# Altium PCB soic-8-breakout-board.PcbDoc
Units mm, origin at the board's own origin, x right, y up, seen from the top; angles counter-clockwise.
Board outline 20.28 x 15.27 mm, 2 copper layers (F.Cu, B.Cu); 3 components, 9 nets, 18 pads, 0 vias.
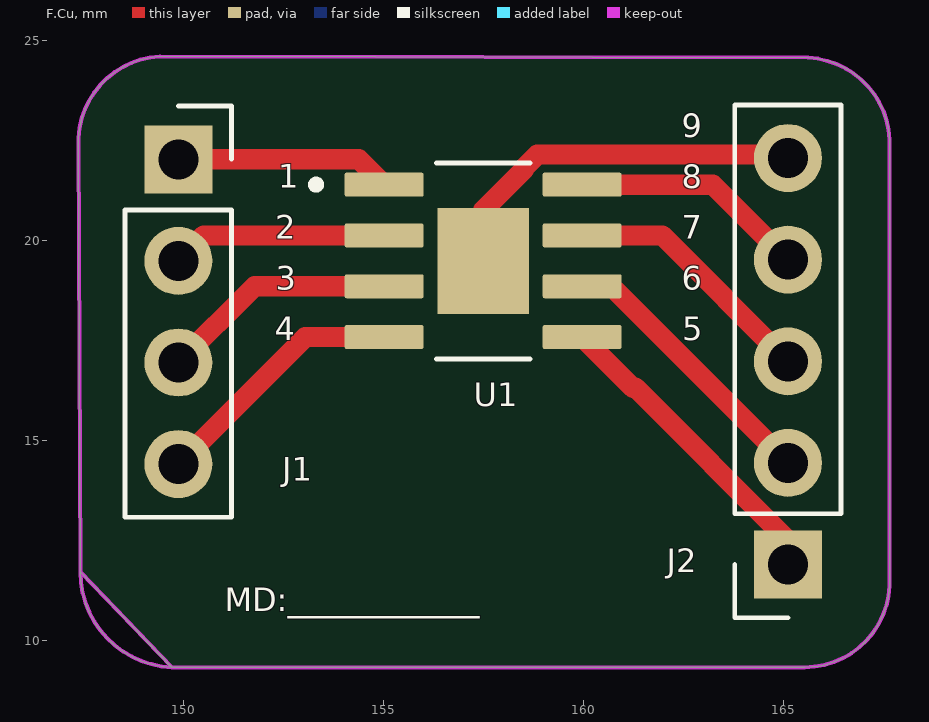
[diagram p0: F.Cu view]
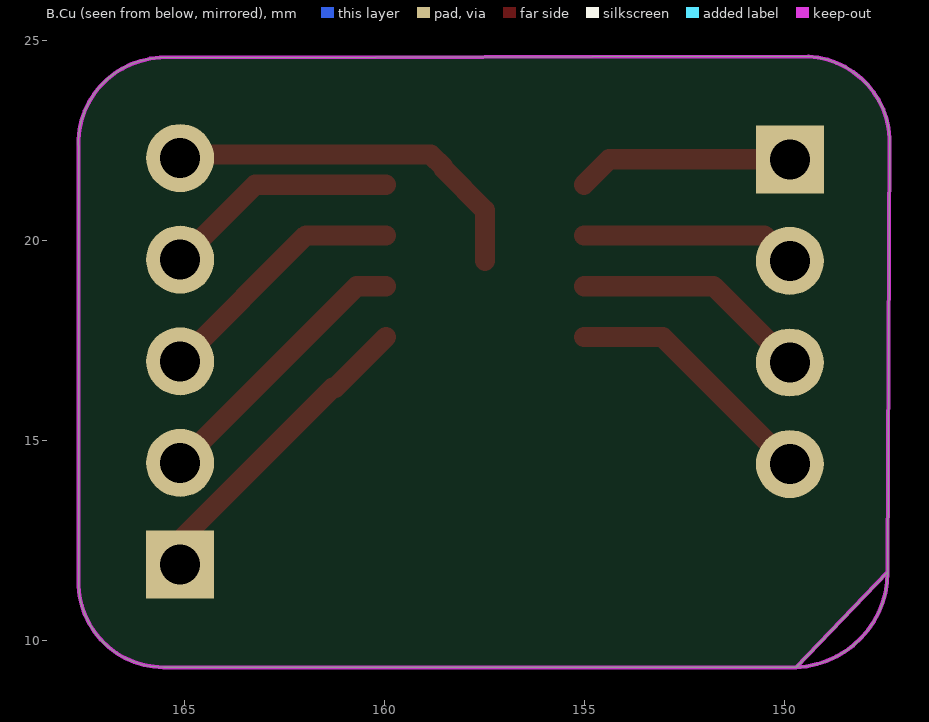
[diagram p1: B.Cu view, seen from below]

## Layer stack, top to bottom
F.Mask: solder mask 0.0102, Solder Resist, Dk 3.5
F.Cu: signal copper 0.0356
Dielectric 1: dielectric 0.32, FR-4, Dk 4.8
B.Cu: signal copper 0.0356
B.Mask: solder mask 0.0102, Solder Resist, Dk 3.5

## Board outline
147.412,11.708 ccw(c149.793,11.708) 149.698,9.33 165.516,9.33 ccw(c165.516,11.457) 167.64,11.362 167.64,22.284 ccw(c165.497,22.426) 149.396,24.6 ccw(c149.507,22.457) 147.364,22.568 147.412,11.708 ccw(c149.793,11.708) 147.412,11.708

## Design rules (kind name [scope] priority, off if disabled: settings)
Clearance [All] p1: gap=0.254 ignorepadtopadclearanceinfootprint=FALSE except(0: Arc-Hole Track-Hole SMDPad-Hole THPad-Hole Via-Hole Fill-Hole Poly-Hole Region-Hole Text-Hole)
MinimumSolderMaskSliver [All] p1: minsoldermaskwidth=0
PolygonConnect [All] p1: connectstyle=Direct reliefconductorwidth=0.254 reliefentries=4 polygonreliefangle="90 Angle" airgapwidth=0.254
RoutingVias [All] p1: holewidth=0.711 width=1.27 viastyle="Through Hole" minholewidth=0.711 minwidth=1.27 maxholewidth=0.711 maxwidth=1.27
SilkToSilkClearance [All] p1: silktosilkclearance=0
SilkToSolderMaskClearance [IsPad] p1: minsilkscreentomaskgap=0 clearancetoexposedcopper=TRUE
SolderMaskExpansion [All] p1: expansion=0.102 istentingtop=FALSE
Width [All] p1: maxlimit=10 minlimit=0.254 preferedwidth=0.254 bottomlayer_maxwidth=0.254 minimp=50.000000 maximp=50.000000 favimp=50.000000
27 further rules are at their usual default settings.

## Components (designator, comment, footprint, x,y, rotation, side; value= is the part's Value field where it differs from the comment)
J1 "Conn_01x04_Female" PinSocket_1x04_P2.54mm_Vertical 149.86,22.03 r0 top
J2 "Conn_01x05_Female" PinSocket_1x05_P2.54mm_Vertical 165.1,11.9 r180 top
U1 "ADP7158ARDZ-3.3-R7" SOIC127P600X175-9N 157.48,19.49 r0 top

## Footprints (in the part's own frame and the unit in brackets; to place one, negate y for a bottom-side part, rotate by r counter-clockwise, add the part's x,y. Pads: shape width x height; smd on the part's side, far side on the other; paste and mask are expansions set on the pad)
PinSocket_1x04_P2.54mm_Vertical [mm]
  rect 1.7x1.7 hole 1 paste-2539.97 mask+0: 1(0,0)
  rrect100% 1.7x1.7 hole 1 paste-2539.97 mask+0: 2(0,-2.54) 3(0,-5.08) 4(0,-7.62)
  silkscreen extent -1.33,-8.95 1.33,1.33
PinSocket_1x05_P2.54mm_Vertical [mm]
  rect 1.7x1.7 hole 1 paste-2539.97 mask+0: 1(0,0)
  rrect100% 1.7x1.7 hole 1 paste-2539.97 mask+0: 2(0,-2.54) 3(0,-5.08) 4(0,-7.62) 5(0,-10.16)
  silkscreen extent -1.33,-11.49 1.33,1.33
SOIC127P600X175-9N [mm]
  rrect15% 1.97x0.6 smd mask+0: 1(-2.475,1.905) 2(-2.475,0.635) 3(-2.475,-0.635) 4(-2.475,-1.905) 5(2.475,-1.905) 6(2.475,-0.635) 7(2.475,0.635) 8(2.475,1.905)
  rect 2.29x2.646 smd mask+0: 9(0,0)
  silkscreen extent -4.27,-2.45 1.17,2.45

## Part data
J1: library part PinSocket_1x04_P2.54mm_Vertical, "Through hole straight socket strip, 1x04, 2.54mm pitch, single row (from Kicad 4.0.7), script generated", Sheetfile=soic-8-breakout-board.kicad_sch
J2: library part PinSocket_1x05_P2.54mm_Vertical, "Through hole straight socket strip, 1x05, 2.54mm pitch, single row (from Kicad 4.0.7), script generated", Sheetfile=soic-8-breakout-board.kicad_sch
U1: library part SOIC127P600X175-9N, MANUFACTURER="ANALOG DEVICES", MAXIMUM_PACKAGE_HEIGHT="1.75 mm", PARTREV=C, SNAPEDA_PN=ADP7158ARDZ-3.3-R7, STANDARD="IPC 7351B", Sheetfile=soic-8-breakout-board.kicad_sch

## Nets (pads, with @x,y where several pads share a name; then routed paths per layer and width w, separated by ;. In a path a pad name is that pad's centre, name@x,y a point inside that pad or via, vN(x,y) a via of type N, cw(c..) or ccw(c..) an arc to the next point about the centre after c; other vN are vias at no path point)
Net-(J1-Pad1): J1.1 U1.1 | length 5.4
  F.Cu w0.508: J1.1 154.37,22.03 U1.1
Net-(J1-Pad2): J1.2 U1.2 | length 5.4
  F.Cu w0.508: J1.2 150.495,20.125 U1.2
Net-(J1-Pad3): J1.3 U1.3 | length 5.9
  F.Cu w0.508: J1.3 151.765,18.855 U1.3
Net-(J1-Pad4): J1.4 U1.4 | length 6.5
  F.Cu w0.508: J1.4 153.035,17.585 U1.4
Net-(J2-Pad1): J2.1 U1.5 | length 7.9
  F.Cu w0.508: U1.5 161.225,16.315 161.29,16.315 165.1,12.505 J2.1
Net-(J2-Pad2): J2.2 U1.6 | length 7
  F.Cu w0.508: U1.6 160.685,18.855 J2.2
Net-(J2-Pad3): J2.3 U1.7 | length 6.4
  F.Cu w0.508: U1.7 161.955,20.125 J2.3
Net-(J2-Pad4): J2.4 U1.8 | length 5.9
  F.Cu w0.508: U1.8 163.225,21.395 J2.4
Net-(J2-Pad5): J2.5 U1.9 | length 9.5
  F.Cu w0.508: U1.9 157.48,20.76 158.516,21.796 158.516,21.83 158.835,22.149 165.011,22.149 J2.5

## Keep-outs
Edge.Cuts:
  lines w0.1: 147.364,22.568 cw(c149.507,22.457) 149.396,24.6 ; 147.364,22.568 cw(c149.507,22.457) 149.396,24.6 ; 147.364,22.568 147.412,11.708 ; 147.364,22.568 147.412,11.708 ; 147.412,11.708 ccw(c149.793,11.708) 149.698,9.33 ; 147.412,11.708 ccw(c149.793,11.708) 149.698,9.33 ; 147.412,11.708 ccw(c149.793,11.708) 149.698,9.33 ; 147.412,11.708 ccw(c149.793,11.708) 149.698,9.33 ; 147.412,11.708 149.698,9.33 ; 149.396,24.6 165.608,24.57 ; 149.396,24.6 165.608,24.57 ; 149.698,9.33 165.516,9.33 ; 149.698,9.33 165.516,9.33 ; 165.516,9.33 ccw(c165.516,11.457) 167.64,11.362 ; 165.516,9.33 ccw(c165.516,11.457) 167.64,11.362 ; 165.608,24.57 cw(c165.497,22.426) 167.64,22.284 ; 165.608,24.57 cw(c165.497,22.426) 167.64,22.284 ; 167.64,11.362 167.64,22.284 ; 167.64,11.362 167.64,22.284

## Silkscreen, mask and mechanical layers (free items; w line width, h text height)
F.SilkS:
  text "9" at 162.444,22.385 h1
  text "1" at 152.364,21.118 h1
  text "8" at 162.441,21.11 h1
  text "2" at 152.285,19.845 h1
  text "7" at 162.447,19.843 h1
  text "3" at 152.296,18.57 h1
  text "6" at 162.444,18.573 h1
  text "4" at 152.277,17.305 h1
  text "5" at 162.453,17.303 h1
  text "MD:____________" at 151.018,10.526 h1